# Altium PCB rffe-uc.PcbDoc
Units mm, origin at the board's own origin, x right, y up, seen from the top; angles counter-clockwise.
Board outline 61.25 x 30.98 mm, 6 copper layers (Top, Power Plane, Inner Layer 1, Inner Layer 2, GND, Bottom), stack 1.58 mm thick; 141 components, 138 nets, 611 pads, 0 vias.
Unrouted connection lines stored in the file: 353.
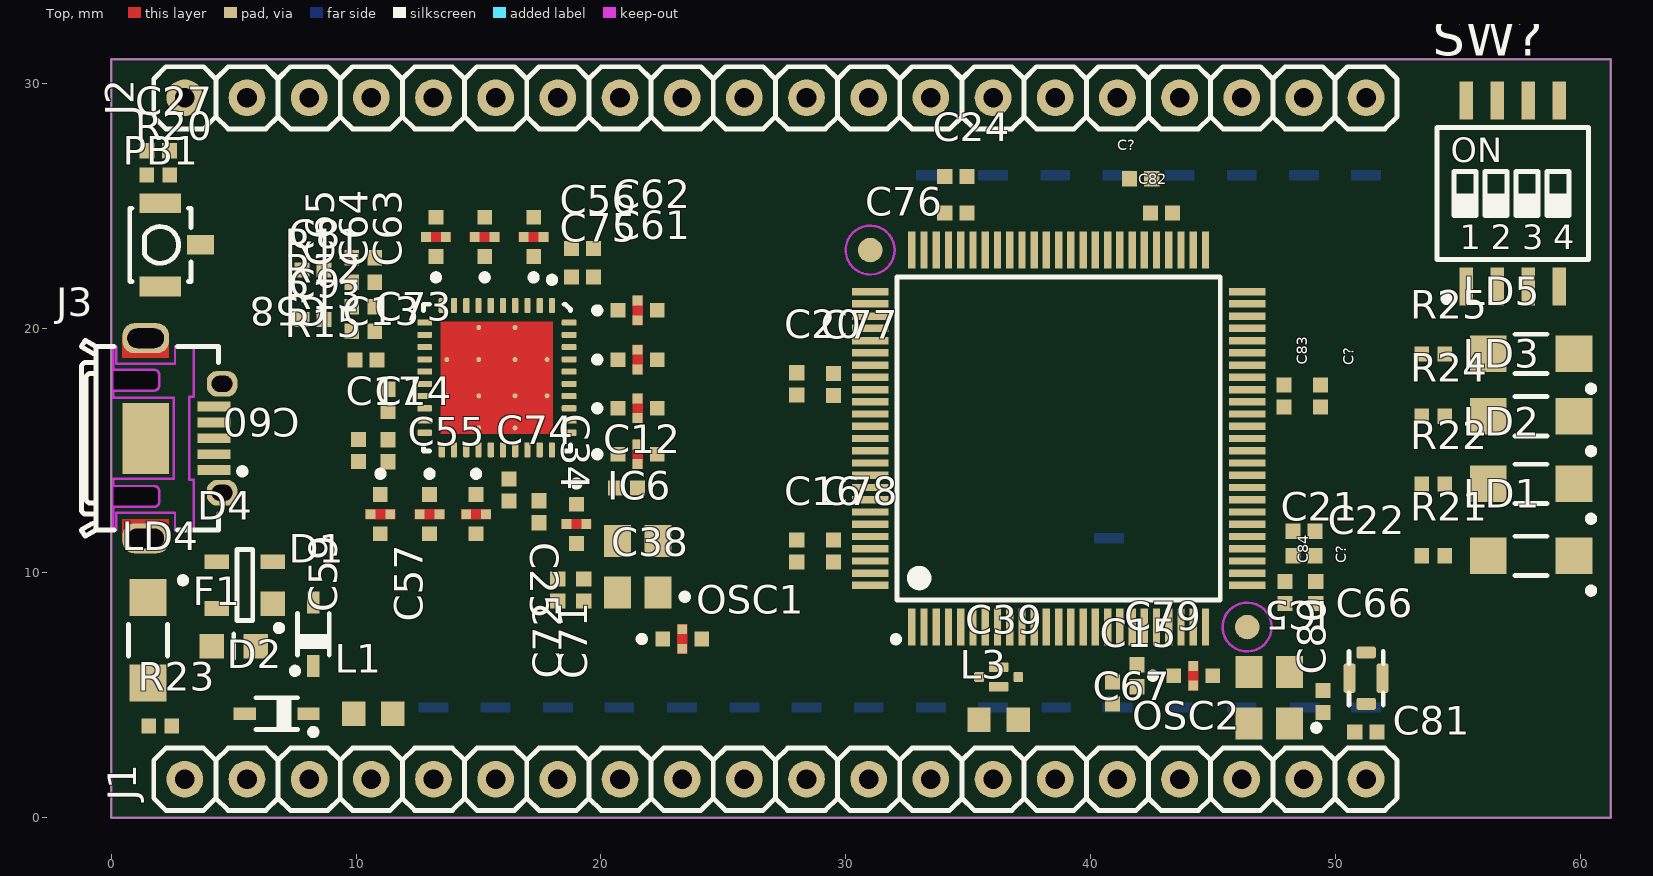
[diagram p0: Top view]
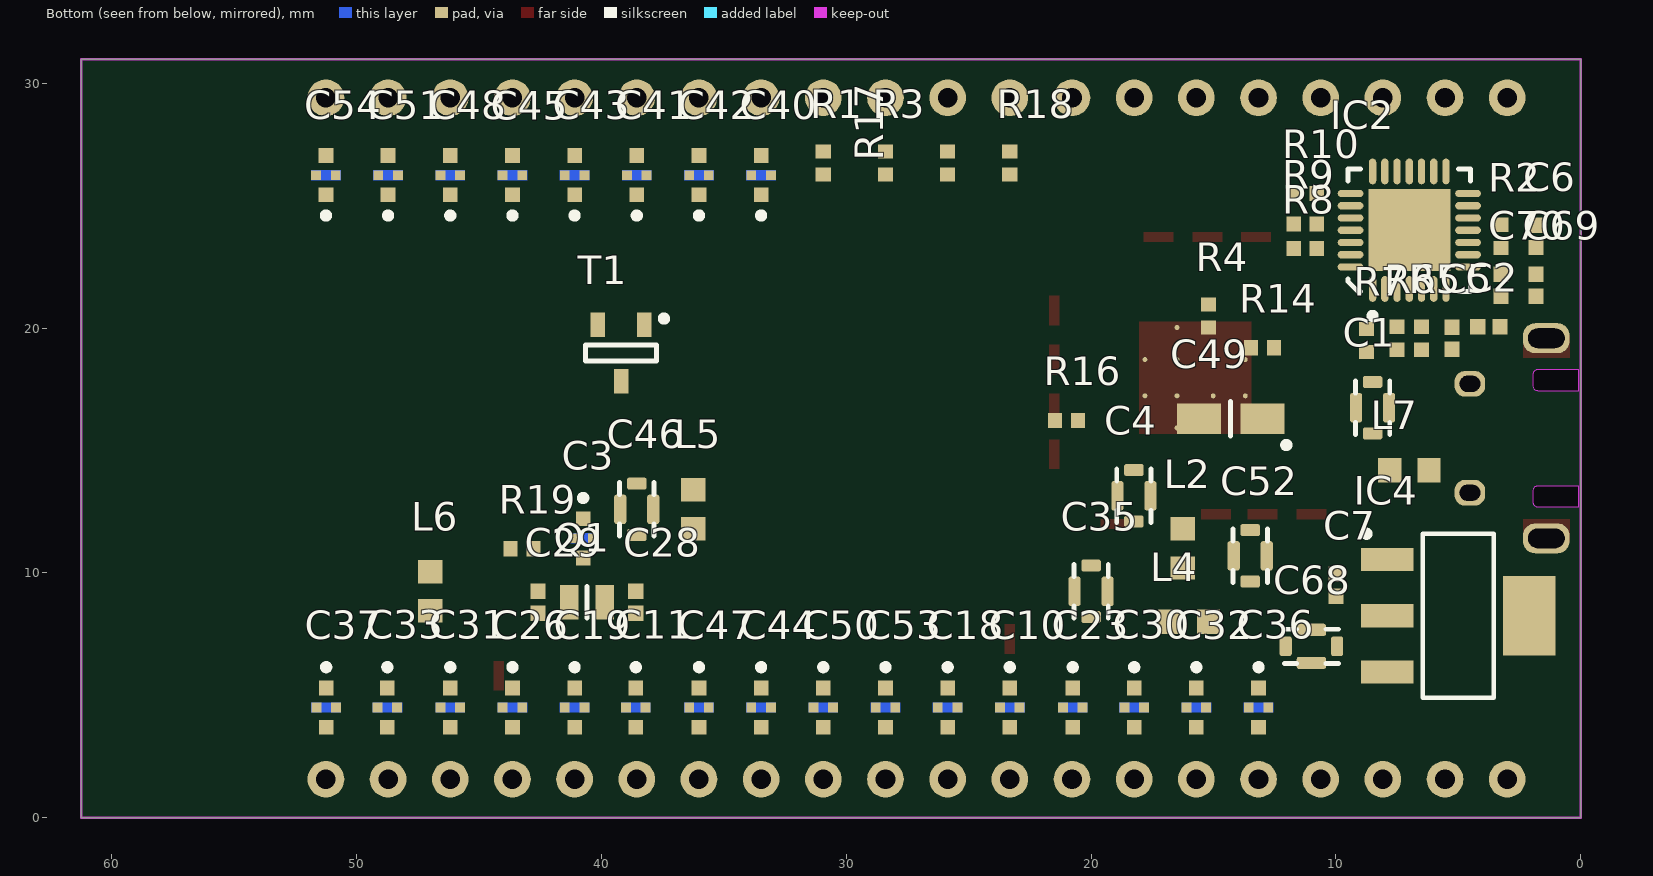
[diagram p1: Bottom view, seen from below]
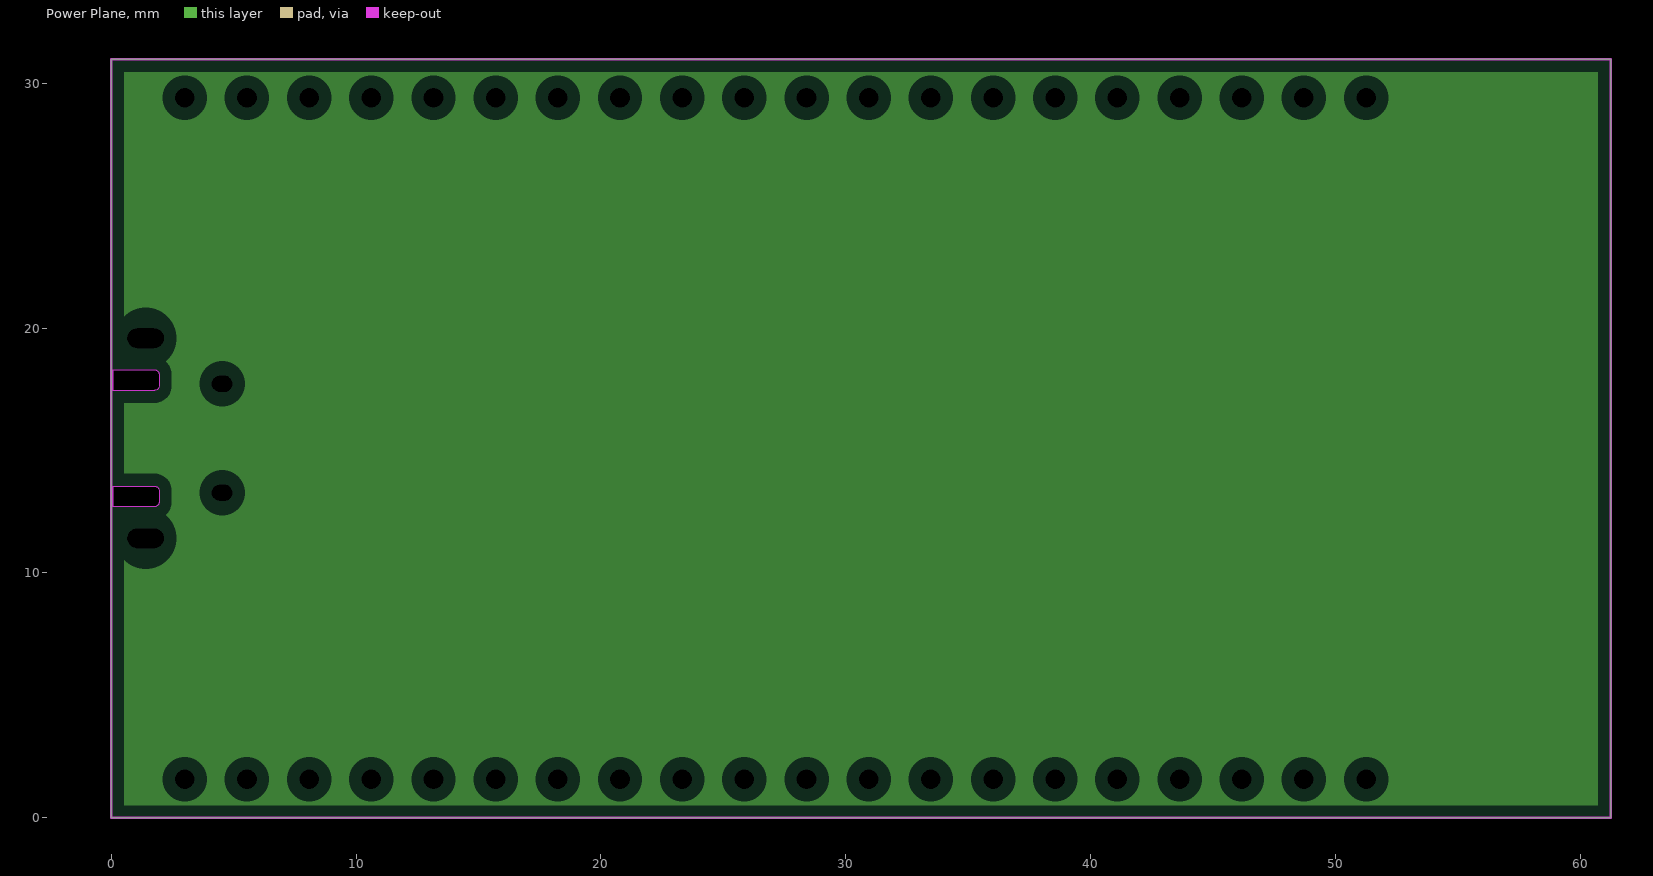
[diagram p2: Power Plane, clearances drawn from the general rule]
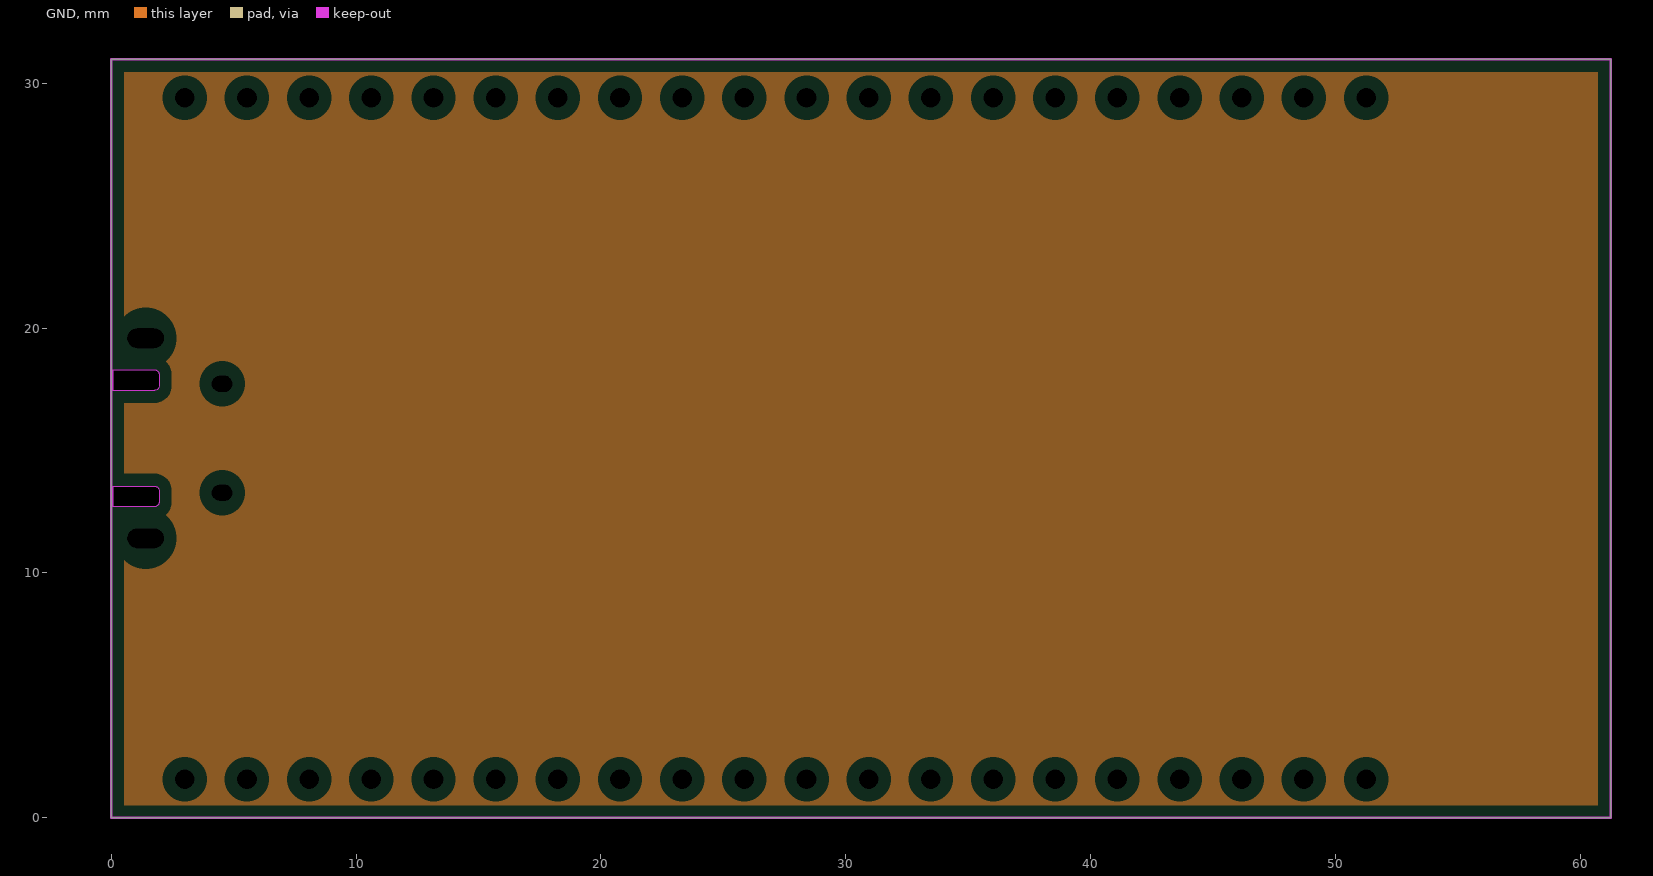
[diagram p3: GND, clearances drawn from the general rule]

## Layer stack, top to bottom
Top Solder: solder mask 0.01, Solder Resist, Dk 3.5
Top: signal copper 0.035
Dielectric 1: prepreg 0.23, FR-4, Dk 4.2
Power Plane: plane copper 0.035
Dielectric 3: prepreg 0.38, Dk 4.2
Inner Layer 1: signal copper 0.035
Dielectric 6: core 0.15, Dk 4.2
Inner Layer 2: signal copper 0.035
Dielectric 5: prepreg 0.38, Dk 4.2
GND: plane copper 0.035
Dielectric 4: prepreg 0.23, Dk 4.2
Bottom: signal copper 0.035
Bottom Solder: solder mask 0.01, Solder Resist, Dk 3.5

## Board outline
0,0 61.25,0 61.25,30.98 0,30.98

## Design rules (kind name [scope] priority, off if disabled: settings)
AcuteAngle [All] p1: minimum=6.00000000000000E+0001 checktracksonly=FALSE
BoardOutlineClearance [All] p1: gap=0.16 ignorepadtopadclearanceinfootprint=FALSE except(0: Arc-SplitContinuation Track-SplitContinuation SMDPad-SplitContinuation THPad-SplitContinuation Via-SplitContinuation Fill-SplitContinuation Poly-SplitContinuation Region-SplitContinuation Text-SplitContinuation)
Clearance [All] p1: gap=0.13 ignorepadtopadclearanceinfootprint=FALSE except(0: Arc-Hole Track-Hole SMDPad-Hole THPad-Hole Via-Hole Fill-Hole Poly-Hole Region-Hole Text-Hole)
ComponentClearance [All] p1: gap=0.025 collisioncheckmode=3 verticalgap=0.254 showdistances=TRUE
DiffPairsRouting [All] p1: maxlimit=0.4 minlimit=0.13 mostfreqgap=0.3 toplayer_minwidth=0.13 toplayer_maxwidth=0.4 toplayer_prefwidth=0.3 midlayer1_maxgap=0.254 midlayer1_prefgap=0.13 midlayer1_minwidth=0.25 midlayer1_maxwidth=0.381 midlayer1_prefwidth=0.25 midlayer2_maxgap=0.254 midlayer2_prefgap=0.13 midlayer2_minwidth=0.25 midlayer2_maxwidth=0.381 midlayer2_prefwidth=0.25 bottomlayer_minwidth=0.13 bottomlayer_maxwidth=0.4 bottomlayer_prefwidth=0.3 maxuncoupledlength=12.7
HoleSize [All] p1: absolutevalues=TRUE maxlimit=2.54 minlimit=0.305 maxpercent=80.000 minpercent=20.000
HoleToHoleClearance [All] p1: gap=0.15 allowstackedmicrovias=TRUE
MinimumAnnularRing [All] p1: minimumring=0.16
MinimumSolderMaskSliver [All] p1: minsoldermaskwidth=0.152
PlaneClearance [All] p1: clearance=0.508
PlaneConnect [All] p1: planeconnectstyle=Relief reliefexpansion=0.508 reliefentries=4 reliefconductorwidth=0.254 reliefairgap=0.254
PolygonConnect [All] p1: connectstyle=Relief reliefconductorwidth=0.254 reliefentries=4 polygonreliefangle="90 Angle" airgapwidth=0.254
RoutingCorners [All] p1: cornerstyle=45-Degree minsetback=1.52 maxsetback=1.52
RoutingVias [All] p1: holewidth=0.305 width=0.625 viastyle="Through Hole" minholewidth=0.305 minwidth=0.625 maxholewidth=0.711 maxwidth=1.27
SilkToSilkClearance [All] p1: silktosilkclearance=0.152
SolderMaskExpansion [All] p1: expansion=0.102
Width [All] p1: maxlimit=0.254 minlimit=0.13 preferedwidth=0.152 minimp=50.000000 maximp=50.000000 favimp=50.000000
21 further rules are at their usual default settings.

## Classes and differential pairs
net class USB_DATA: NetC21_2 NetC22_2 TGT_D_N TGT_D_P USB_D_N USB_D_P USB_D_R_N USB_D_R_P
net class ETH: RD_N RD_P TD_N TD_P
differential pair USB_D: +USB_D_P -USB_D_N
differential pair USB_D_R: +USB_D_R_P -USB_D_R_N
differential pair TGT_D: +TGT_D_P -TGT_D_N
differential pair TD: +TD_P -TD_N
differential pair RD: +RD_P -RD_N

## Components (designator, comment, footprint, x,y, rotation, side; value= is the part's Value field where it differs from the comment)
C1 "10uF" CAPC_MURATA_NFM21PS_0805 8.5,16.75 r90 bottom
C2 "1uF" CAPC1005X55N 3.75,20.058 r0 bottom
C3 "50pF" CAPC_MURATA_NFL18ST 40.75,11.412 r270 bottom
C4 "10uF" CAPC_MURATA_NFM21PS_0805 18.25,13.15 r90 bottom
C5 "100nF" CAPC1005X55N 5.25,19.588 r270 bottom
C6 "1uF" CAPC1005X55N 1.827,23.75 r90 bottom
C7 "100nF" CAPC1005X55N 10,9.5 r270 bottom
C8 "100nF" CAPC1005X55N 8.24,22.375 r180 top
C9 "100nF" CAPC1005X55N 8.24,20.35 r0 top
C10 "50pF" CAPC_MURATA_NFL18ST 23.32,4.5 r270 bottom
C11 "50pF" CAPC_MURATA_NFL18ST 38.6,4.5 r270 bottom
C12 "100nF" CAPC1005X55N 21.05,13.463 r0 top
C13 "100nF" CAPC1005X55N 10.4,18.7 r180 top
C14 "100nF" CAPC1005X55N 11.3,14.99 r270 top
C15 "100nF" CAPC1005X55N 40.9,5.1 r270 top
C16 "100nF" CAPC1005X55N 28,10.9 r270 top
C17 "100nF" CAPC1005X55N 10.1,15 r270 top
C18 "50pF" CAPC_MURATA_NFL18ST 25.86,4.5 r270 bottom
C19 "50pF" CAPC_MURATA_NFL18ST 41.1,4.5 r270 bottom
C20 "100nF" CAPC1005X55N 28,17.725 r90 top
C21 "18pF" CAPC1005X55N 48.72,10.7 r180 top
C22 "18pF" CAPC1005X55N 48.72,11.7 r180 top
C23 "50pF" CAPC_MURATA_NFL18ST 20.75,4.5 r270 bottom
C24 "100nF" CAPC1005X55N 34.5,26.2 r180 top
C25 "100nF" CAPC1005X55N 17.47,12.5 r270 top
C26 "50pF" CAPC_MURATA_NFL18ST 43.64,4.5 r270 bottom
C27 "100nF" CAPC1005X55N 1.92,27.25 r0 top
C28 "18pF" CAPC1005X55N 38.6,8.8 r90 bottom
C29 "18pF" CAPC1005X55N 42.6,8.8 r90 bottom
C30 "50pF" CAPC_MURATA_NFL18ST 18.24,4.5 r270 bottom
C31 "50pF" CAPC_MURATA_NFL18ST 46.18,4.5 r270 bottom
C32 "50pF" CAPC_MURATA_NFL18ST 15.7,4.5 r270 bottom
C33 "50pF" CAPC_MURATA_NFL18ST 48.75,4.5 r270 bottom
C34 "50pF" CAPC_MURATA_NFL18ST 19,12 r270 top
C35 "10uF" CAPC_MURATA_NFM21PS_0805 20,9.25 r270 bottom
C36 "50pF" CAPC_MURATA_NFL18ST 13.16,4.5 r270 bottom
C37 "50pF" CAPC_MURATA_NFL18ST 51.25,4.5 r270 bottom
C38 "50pF" CAPC_MURATA_NFL18ST 23.32,7.3 r0 top
C39 "1uF" CAPC_MURATA_NFM18PS_0603 36.25,5.75 r0 top
C40 "50pF" CAPC_MURATA_NFL18ST 33.48,26.25 r90 bottom
C41 "50pF" CAPC_MURATA_NFL18ST 38.56,26.25 r90 bottom
C42 "50pF" CAPC_MURATA_NFL18ST 36.02,26.25 r90 bottom
C43 "50pF" CAPC_MURATA_NFL18ST 41.1,26.25 r90 bottom
C44 "50pF" CAPC_MURATA_NFL18ST 33.48,4.5 r270 bottom
C45 "50pF" CAPC_MURATA_NFL18ST 43.64,26.25 r90 bottom
C46 "10uF" CAPC_MURATA_NFM21PS_0805 38.56,12.6 r90 bottom
C47 "50pF" CAPC_MURATA_NFL18ST 36.02,4.5 r270 bottom
C48 "50pF" CAPC_MURATA_NFL18ST 46.18,26.25 r90 bottom
C49 "10uF" CAPMP3216X180N 14.3,16.3 r0 bottom
C50 "50pF" CAPC_MURATA_NFL18ST 30.94,4.5 r270 bottom
C51 "50pF" CAPC_MURATA_NFL18ST 48.72,26.25 r90 bottom
C52 "10uF" CAPC_MURATA_NFM21PS_0805 13.5,10.7 r270 bottom
C53 "50pF" CAPC_MURATA_NFL18ST 28.4,4.5 r270 bottom
C54 "50pF" CAPC_MURATA_NFL18ST 51.26,26.25 r90 bottom
C55 "50pF" CAPC_MURATA_NFL18ST 13,12.4 r270 top
C56 "100nF" CAPC1005X55N 19.25,23.25 r0 top
C57 "50pF" CAPC_MURATA_NFL18ST 14.9,12.4 r270 top
C58 "50pF" CAPC_MURATA_NFL18ST 21.5,14.85 r0 top
C59 "50pF" CAPC_MURATA_NFL18ST 10.99,12.4 r270 top
C60 "50pF" CAPC_MURATA_NFL18ST 21.5,16.725 r0 top
C61 "50pF" CAPC_MURATA_NFL18ST 21.5,18.715 r0 top
C62 "50pF" CAPC_MURATA_NFL18ST 21.5,20.725 r0 top
C63 "50pF" CAPC_MURATA_NFL18ST 17.25,23.725 r90 top
C64 "50pF" CAPC_MURATA_NFL18ST 15.25,23.725 r90 top
C65 "50pF" CAPC_MURATA_NFL18ST 13.26,23.725 r90 top
C66 "10uF" CAPC_MURATA_NFM21PS_0805 51.26,5.7 r90 top
C67 "50pF" CAPC_MURATA_NFL18ST 44.2,5.8 r0 top
C68 "10uF" CAPC_MURATA_NFM21PS_0805 11,7 r180 bottom
C69 "100nF" CAPC1005X55N 1.827,21.75 r90 bottom
C70 "100pF" CAPC1005X55N 3.25,21.75 r90 bottom
C71 "100pF" CAPC1005X55N 19.3,9.3 r270 top
C72 "100nF" CAPC1005X55N 18.24,9.3 r90 top
C73 "100pF" CAPC1005X55N 11.3,17.05 r270 top
C74 "100pF" CAPC1005X55N 16.25,13.39 r90 top
C75 "100pF" CAPC1005X55N 19.25,22.09 r180 top
C76 "100pF" CAPC1005X55N 34.5,24.7 r0 top
C77 "100pF" CAPC1005X55N 29.5,17.7 r270 top
C78 "100pF" CAPC1005X55N 29.5,10.9 r90 top
C79 "100pF" CAPC1005X55N 41.9,5.8 r90 top
C80 "100nF" CAPC1005X55N 49.5,4.75 r90 top
C81 "100pF" CAPC1005X55N 51.25,3.5 r180 top
C82 "100pF" CAPC1005X55N 42.9,24.7 r0 top
C83 "100pF" CAPC1005X55N 47.9,17.225 r90 top
C84 "100pF" CAPC1005X55N 47.95,9.2 r90 top
C? "100nF" CAPC1005X55N 49.4,17.225 r270 top
C? "100nF" CAPC1005X55N 49.2,9.2 r270 top
C? "100nF" CAPC1005X55N 42.05,26.1 r180 top
D1 "BAT60A" SOD2512X110N 8.25,7.5 r90 top
D2 "BAT60A" SOD2512X110N 6.75,4.25 r180 top
D4 "PRTR5V0U2X" SOT190P230X110-4N 5.45,9.5 r180 top
F1 "350mA-6V" FUSR_LITTELFUSE_0603L010 5,7 r180 top
IC2 "CP2102-GM" QFN50P500X500X100-29N-S335 7,24 r90 bottom
IC4 "LD1117S33" SOT230P700X180-4N 5,8.25 r180 bottom
IC5 "LPC1769FBD100" QFP50P1600X1600X160-100N 38.7,15.49 r90 top
IC6 "DP83848J" QFN50P600X600X100-41N-S460_DP83848J 15.75,17.975 r270 top
J1 "" TYCO_1-1814655-5 3,1.57 r0 top locked
J2 "" TYCO_1-1814655-5 3,29.41 r0 top locked
J3 "" HIROSE_ZX62RD-AB-5P8 4.2,15.5 r270 top locked
L1 "1K@100MHz" INDC1608X95N 10.7,4.25 r180 top
L2 "1K@100MHz" INDC1608X95N 16.25,11 r90 bottom
L3 "1K@100MHz" INDC1608X95N 36.25,4 r0 top
L4 "1K@100MHz" INDC1608X95N 16,8 r0 bottom
L5 "1K@100MHz" INDC1608X95N 36.25,12.6 r270 bottom
L6 "1K@100MHz" INDC1608X95N 47,9.25 r90 bottom
L7 "1K@100MHz" INDC1608X95N 7,14.2 r0 bottom
LD1 "" LED_LITEON_LTST-C150TBKT 58,10.7 r180 top
LD2 "" LED_LITEON_LTST-C150TBKT 58,13.638 r180 top
LD3 "" LED_LITEON_LTST-C150TBKT 58,16.4 r180 top
LD4 "" LED_LITEON_LTST-C150TBKT 1.5,7.25 r270 top
LD5 "" LED_LITEON_LTST-C150TBKT 58,18.95 r180 top
OSC1 "50MHz" XTAL_CONNOR_CS_LNLS 21.5,10.25 r180 top
OSC2 "12MHz" XTAL_CONNOR_CS_LNLS 47.3,4.9 r180 top
PB1 "Push Button" PB_OMRON_B3U-1100P 2,23.4 r90 top
Q1 "32.768kHz" XTAL_ABRACON_ABS06 40.6,8.8 r180 bottom
R1 "220" RESC1005X40N 30.94,26.75 r270 bottom
R2 "2k2" RESC1005X40N 3.25,23.75 r90 bottom
R3 "220" RESC1005X40N 28.4,26.75 r270 bottom
R4 "2k2" RESC1005X40N 15.2,20.5 r90 bottom
R5 "33" RESC1005X40N 6.5,19.588 r90 bottom
R6 "33" RESC1005X40N 7.5,19.588 r90 bottom
R7 "2k2" RESC1005X40N 8.75,19.5 r90 bottom
R8 "2k2" RESC1005X40N 11.25,23.25 r0 bottom
R9 "2k2" RESC1005X40N 11.25,24.25 r0 bottom
R10 "10k" RESC1005X40N 11.25,25.5 r180 bottom
R11 "49R9" RESC1005X40N 10.29,22.875 r0 top
R12 "49R9" RESC1005X40N 10.29,21.875 r180 top
R13 "49R9" RESC1005X40N 10.29,20.875 r0 top
R14 "4k87" RESC1005X40N 13,19.2 r0 bottom
R15 "49R9" RESC1005X40N 10.29,19.875 r180 top
R16 "2k2" RESC1005X40N 21,16.225 r180 bottom
R17 "33" RESC1005X40N 25.86,26.75 r270 bottom
R18 "33" RESC1005X40N 23.32,26.75 r270 bottom
R19 "1k5" RESC1005X40N 43.25,10.99 r0 bottom
R20 "10k" RESC1005X40N 1.92,26.25 r0 top
R21 "220" RESC1005X40N 54,10.7 r0 top
R22 "220" RESC1005X40N 54,13.638 r0 top
R23 "220" RESC1005X40N 2,3.75 r180 top
R24 "220" RESC1005X40N 54,16.4 r180 top
R25 "220" RESC1005X40N 54,18.95 r0 top
SW? "Switch" SW_TYCO_1571983-4 57.25,25.5 r90 top
T1 "BSS84AK" SOT95P230X110-3N 39.2,18.99 r270 bottom

## Footprints (in the part's own frame and the unit in brackets; to place one, negate y for a bottom-side part, rotate by r counter-clockwise, add the part's x,y. Pads: shape width x height; smd on the part's side, far side on the other; paste and mask are expansions set on the pad)
CAPC1005X55N [mm] "Chip Capacitor, Body 1.0x0.55mm, IPC Medium Density"
  rect 0.62x0.62 smd: 1(-0.45,0) 2(0.45,0)
  body extent -0.52,-0.27 0.53,0.28, height 0.55
CAPC_MURATA_NFL18ST [mm] "EMIFIL Chip Capacitor, Body 1.6x0.8mm, MURATA NFL18ST Series"
  rect 0.6x0.6 smd: 1(-0.8,0) 3(0.8,0)
  rect 0.4x0.4 smd: 2(0,-0.4) 2(0,0.4)
  Top region: -0.2,0.6 -0.2,-0.6 0.2,-0.6 0.2,0.6
  silkscreen extent -1.77,-0.13 -1.53,0.12
CAPC_MURATA_NFM18PS_0603 [mm] "EMIFIL Chip Capacitor, Body 1.6x0.8mm, MURATA NFM18PS Series"
  rrect25% 0.4x0.4 smd: 1(-0.8,0) 3(0.8,0)
  rrect25% 0.8x0.4 smd: 2(0,-0.4) 2(0,0.4)
CAPC_MURATA_NFM21PS_0805 [mm] "EMIFIL Chip Capacitor, Body 2.0x1.25mm, MURATA NFM21PS Serie"
  rrect40% 0.5x0.8 smd: 1(-1.05,0) 3(1.05,0)
  rrect40% 1.2x0.5 smd: 2(0,-0.675) 2(0,0.675)
  silkscreen extent -1.1,-0.7 1.1,0.7, body extent -1.1,-0.67 1.1,0.68, height 0.95
CAPMP3216X180N [mm] "Capacitor, Polarized, Molded  Body 3.2x1.6mm, IPC Medium Density"
  rect 1.8x1.25 smd: 1(-1.3,0) 2(1.3,0)
  silkscreen extent -2.4,-0.7 0,1.2, body extent -1.7,-0.9 1.7,0.9, height 1.6
FUSR_LITTELFUSE_0603L010 [mm] "Surface Mount POLY-FUSE® Resettable PTC, 0603L Series"
  rect 1x1 smd: 1(-0.9,0) 2(0.9,0)
  silkscreen extent 0,-0.5 0,0.5, body extent -0.8,-0.4 0.8,0.4, height 0.75
HIROSE_ZX62RD-AB-5P8 [mm] "Right Angle, SMD Micro-USB Type AB - Reverse (Top mount), Shell Through Hole"
  rect 0.4x1.35 smd: 1(1.3,0) 2(0.65,0) 3(0,0) 4(-0.65,0) 5(-1.3,0)
  rrect80% 1.225x1.9 hole 0.8 slot 1.5 at 90 deg: 6(-4.088,-2.8) 6(4.088,-2.8)
  rrect80% 1.05x1.25 hole 0.65 slot 0.85 at 90 deg: 6(-2.225,0.325) 6(2.225,0.325)
  rect 2.9x1.9 smd: PastePad(0,-2.8)
  Top region: -4.2,-1.85 -4.2,-3.75 -3.3,-3.75 -3.3,-3.75 -3.3,-1.85
  Top region: 4.2,-3.75 4.2,-1.85 3.3,-1.85 3.3,-1.85 3.3,-3.75
  Top keep-out lines w0.1: 3.75,-4.125 3.75,-4 3.05,-4 3.05,-1.6 3.75,-1.6 3.75,-0.825 1.7,-0.825 1.7,-1.025 -1.7,-1.025 -1.7,-0.825 -3.75,-0.825 -3.75,-1.6 -3.05,-1.6 -3.05,-4 -3.75,-4 -3.75,-4.125 -2.8,-4.125 -2.8,-2.45 cw(c-2.6,-2.45) -2.6,-2.25 -2.15,-2.25 cw(c-2.15,-2.45) -1.95,-2.45 -1.95,-4.125 -1.65,-4.125 -1.65,-1.65 1.65,-1.65 1.65,-4.125 1.95,-4.125 1.95,-2.45 cw(c2.15,-2.45) 2.15,-2.25 2.6,-2.25 cw(c2.6,-2.45) 2.8,-2.45 2.8,-4.125 3.75,-4.125
  Keep-Out Layer board cut-out: 1.95,-4.125 1.95,-2.45 1.965,-2.373 2.009,-2.309 2.074,-2.265 2.15,-2.25 2.15,-2.25 2.6,-2.25 2.677,-2.265 2.741,-2.309 2.785,-2.373 2.8,-2.45 2.8,-2.45 2.8,-4.125
  Keep-Out Layer board cut-out: -2.8,-4.125 -2.8,-2.45 -2.785,-2.373 -2.741,-2.309 -2.676,-2.265 -2.6,-2.25 -2.6,-2.25 -2.15,-2.25 -2.073,-2.265 -2.009,-2.309 -1.965,-2.373 -1.95,-2.45 -1.95,-2.45 -1.95,-4.125
  silkscreen extent -4,-5.42 4,1.28, body extent -4.32,-5.42 4.33,0.47, height 2.78
INDC1608X95N [mm] "Chip Inductor, 2-Leads, EIA 0603, Metric 1608, Body 1.6x0.8mm, IPC Medium Density"
  rect 0.95x1 smd: 1(-0.8,0) 2(0.8,0)
  body extent -0.87,-0.47 0.88,0.48, height 0.95
LED_LITEON_LTST-C150TBKT [mm] "SMD InGaN Blue LED, 2-Leads, Body 3.2x1.6mm"
  rect 1.5x1.5 smd: 1(-1.75,0) 2(1.75,0)
  silkscreen extent -2.58,-0.8 0.65,1.55, body extent -1.6,-0.8 1.6,0.8, height 1.1
PB_OMRON_B3U-1100P [mm] "Body 1.2x3x2.5mm Ultra-Small Tactile Pushbutton Switch, (with Ground Terminal), OMRON B3U Series"
  rect 0.8x1.7 smd: 1(-1.7,0) 2(1.7,0)
  rect 0.8x1.1 smd: 3(0,-1.65)
  silkscreen extent -1.5,-1.25 1.5,1.25, body extent -2,-1.95 2,1.25, height 1.75
QFN50P500X500X100-29N-S335 [mm] "QFN, 0.50mm Pitch, Square; 28 pin, 5.00mm L X 5.00mm W X 1.00mm H body (w/thermal tab 3.35 X 3.35mm),  IPC Medium Density"
  oval 1.05x0.3 smd: 1(-2.4,1.5) 2(-2.4,1) 3(-2.4,0.5) 4(-2.4,0) 5(-2.4,-0.5) 6(-2.4,-1) 7(-2.4,-1.5) 15(2.4,-1.5) 16(2.4,-1) 17(2.4,-0.5) 18(2.4,0) 19(2.4,0.5) 20(2.4,1) 21(2.4,1.5)
  oval 0.3x1.05 smd: 8(-1.5,-2.4) 9(-1,-2.4) 10(-0.5,-2.4) 11(0,-2.4) 12(0.5,-2.4) 13(1,-2.4) 14(1.5,-2.4) 22(1.5,2.4) 23(1,2.4) 24(0.5,2.4) 25(0,2.4) 26(-0.5,2.4) 27(-1,2.4) 28(-1.5,2.4)
  rect 3.35x3.35 smd: 29(0,0)
  silkscreen extent -3.62,-2.5 2.5,2.5, body extent -2.5,-2.5 2.5,2.5, height 1
QFN50P600X600X100-41N-S460_DP83848J [mm] "QFN, 0.50mm Pitch, Square 40 pin, 6.00mm L X 6.00mm W X 1.00mm H body (w/thermal tab 4.6mm x 4.6mm), IPC Medium Density"
  rrect25% 0.6x0.25 smd: 1(-2.95,2.25) 2(-2.95,1.75) 3(-2.95,1.25) 4(-2.95,0.75) 5(-2.95,0.25) 6(-2.95,-0.25) 7(-2.95,-0.75) 8(-2.95,-1.25) 9(-2.95,-1.75) 10(-2.95,-2.25) 21(2.95,-2.25) 22(2.95,-1.75) 23(2.95,-1.25) 24(2.95,-0.75) 25(2.95,-0.25) 26(2.95,0.25) 27(2.95,0.75) 28(2.95,1.25) 29(2.95,1.75) 30(2.95,2.25)
  rrect25% 0.25x0.6 smd: 11(-2.25,-2.95) 12(-1.75,-2.95) 13(-1.25,-2.95) 14(-0.75,-2.95) 15(-0.25,-2.95) 16(0.25,-2.95) 17(0.75,-2.95) 18(1.25,-2.95) 19(1.75,-2.95) 20(2.25,-2.95) 31(2.25,2.95) 32(1.75,2.95) 33(1.25,2.95) 34(0.75,2.95) 35(0.25,2.95) 36(-0.25,2.95) 37(-0.75,2.95) 38(-1.25,2.95) 39(-1.75,2.95) 40(-2.25,2.95)
  round 0.2 all layers, no hole: 41(-2.05,-0.74) 41(-2.05,0.74) 41(-0.74,2.05) 41(-0.74,0.74) 41(-0.74,-0.74) 41(-0.74,-2.05) 41(0.74,2.05) 41(0.74,0.74) 41(0.74,-0.74) 41(0.74,-2.05) 41(2.05,-0.74) 41(2.05,0.74)
  Top region: -2.3,-2.3 2.3,-2.3 2.3,2.3 -2.3,2.3
  silkscreen extent -4.12,-3 3,3, body extent -3,-3 3,3, height 1
QFP50P1600X1600X160-100N [mm] "QFP, 0.50mm Pitch, Square; 100 Pin,14.00mm L X 14.00mm W X 1.60mm H Body, IPC Medium Density"
  rect 1.5x0.3 smd: 1(-7.7,6) 2(-7.7,5.5) 3(-7.7,5) 4(-7.7,4.5) 5(-7.7,4) 6(-7.7,3.5) 7(-7.7,3) 8(-7.7,2.5) 9(-7.7,2) 10(-7.7,1.5) 11(-7.7,1) 12(-7.7,0.5) 13(-7.7,0) 14(-7.7,-0.5) 15(-7.7,-1) 16(-7.7,-1.5) 17(-7.7,-2) 18(-7.7,-2.5) 19(-7.7,-3) 20(-7.7,-3.5) 21(-7.7,-4) 22(-7.7,-4.5) 23(-7.7,-5) 24(-7.7,-5.5) 25(-7.7,-6) 51(7.7,-6) 52(7.7,-5.5) 53(7.7,-5) 54(7.7,-4.5) 55(7.7,-4) 56(7.7,-3.5) 57(7.7,-3) 58(7.7,-2.5) 59(7.7,-2) 60(7.7,-1.5) 61(7.7,-1) 62(7.7,-0.5) 63(7.7,0) 64(7.7,0.5) 65(7.7,1) 66(7.7,1.5) 67(7.7,2) 68(7.7,2.5) 69(7.7,3) 70(7.7,3.5) 71(7.7,4) 72(7.7,4.5) 73(7.7,5) 74(7.7,5.5) 75(7.7,6)
  rect 0.3x1.5 smd: 26(-6,-7.7) 27(-5.5,-7.7) 28(-5,-7.7) 29(-4.5,-7.7) 30(-4,-7.7) 31(-3.5,-7.7) 32(-3,-7.7) 33(-2.5,-7.7) 34(-2,-7.7) 35(-1.5,-7.7) 36(-1,-7.7) 37(-0.5,-7.7) 38(0,-7.7) 39(0.5,-7.7) 40(1,-7.7) 41(1.5,-7.7) 42(2,-7.7) 43(2.5,-7.7) 44(3,-7.7) 45(3.5,-7.7) 46(4,-7.7) 47(4.5,-7.7) 48(5,-7.7) 49(5.5,-7.7) 50(6,-7.7) 76(6,7.7) 77(5.5,7.7) 78(5,7.7) 79(4.5,7.7) 80(4,7.7) 81(3.5,7.7) 82(3,7.7) 83(2.5,7.7) 84(2,7.7) 85(1.5,7.7) 86(1,7.7) 87(0.5,7.7) 88(0,7.7) 89(-0.5,7.7) 90(-1,7.7) 91(-1.5,7.7) 92(-2,7.7) 93(-2.5,7.7) 94(-3,7.7) 95(-3.5,7.7) 96(-4,7.7) 97(-4.5,7.7) 98(-5,7.7) 99(-5.5,7.7) 100(-6,7.7)
  round 1 smd paste-0.51 mask+0.5: FTG1(-7.7,-7.7) FTG2(7.7,7.7)
  Top keep-out circle w0.1: c7.7,7.7 r1
  Top keep-out circle w0.1: c-7.7,-7.7 r1
  silkscreen extent -8.32,-6.6 6.6,6.77, body extent -8.02,-8.02 8.02,8.02, height 1.6
RESC1005X40N [mm] "Chip Resistor, EIA 0402, Metric 1005, Body 1.0x0.5mm, IPC Medium Density"
  rect 0.58x0.62 smd: 1(-0.47,0) 2(0.47,0)
  body extent -0.52,-0.27 0.53,0.28, height 0.4
SOD2512X110N [mm] "Small Outline Diode Flat Lead (SOD-323), 1.70mm W X 1.25mm L X 1.10mm H body,  IPC Medium Density"
  rect 0.9x0.5 smd: 1(-1.3,0) 2(1.3,0)
  silkscreen extent -1.62,-0.65 0.85,0.87, body extent -1.35,-0.67 1.35,0.68, height 1.1
SOT95P230X110-3N [mm] "SOT23, 3 pin, Pitch 0.95mm - 1.3mm W X 2.9mm L X 1.1mm H, IPC Medium Density"
  rect 1x0.6 smd: 1(-1.15,0.95) 2(-1.15,-0.95) 3(1.15,0)
  silkscreen extent -1.52,-1.45 0.33,1.87, body extent -1.17,-1.5 1.33,1.5, height 1.1
SOT190P230X110-4N [mm] "SOT143, SOT, 1.90mm Pitch; 4 Pin, 1.30mm W X 2.90mm L X 1.10mm H body, IPC Medium Density"
  rect 1x1 smd: 1(-1.15,0.75)
  rect 1x0.6 smd: 2(-1.15,-0.95) 3(1.15,-0.95) 4(1.15,0.95)
  silkscreen extent -1.53,-1.45 0.33,1.87, body extent -1.25,-1.5 1.25,1.5, height 1.1
SOT230P700X180-4N [mm] "SOT223, 2.30mm pitch; 3 pin, 3.70mm W X 6.70mm L, IPC Medium Density"
  rect 2.15x0.95 smd: 1(-2.9,2.3) 2(-2.9,0) 3(-2.9,-2.3)
  rect 2.15x3.25 smd: 4(2.9,0)
  silkscreen extent -3.88,-3.35 1.45,3.47, body extent -3.65,-3.35 3.65,3.35, height 1.81
SW_TYCO_1571983-4 [mm] "Pitch 1.27mm,  Body 6.2x6.2mm, 4 Ways SPST Surface-Mount DIP Switch, TYCO GDH Serie"
  rect 1.55x0.55 smd: 1(-3.8,1.905) 2(-3.8,0.635) 3(-3.8,-0.635) 4(-3.8,-1.905) 5(3.8,-1.905) 6(3.8,-0.635) 7(3.8,0.635) 8(3.8,1.905)
  silkscreen extent -4.42,-3.1 2.7,3.1, body extent -4.06,-3.1 4.06,3.1, height 2.36
TYCO_1-1814655-5 [mm] "20 Positions, Pitch 2.54mm, Width 2.54mm, Heigh 4.4mm, SIP Straight Socket"
  round 1.5 hole 0.8: 1(0,0) 2(2.54,0) 3(5.08,0) 4(7.62,0) 5(10.16,0) 6(12.7,0) 7(15.24,0) 8(17.78,0) 9(20.32,0) 10(22.86,0) 11(25.4,0) 12(27.94,0) 13(30.48,0) 14(33.02,0) 15(35.56,0) 16(38.1,0) 17(40.64,0) 18(43.18,0) 19(45.72,0) 20(48.26,0)
  silkscreen extent -1.27,-1.27 49.53,1.27, body extent -1.27,-1.27 49.53,1.27, height 4.4
XTAL_ABRACON_ABS06 [mm] "2 Pins, 2.15x1.3mm, SMD Low Profile Crystal, ABS06 Series"
  rect 0.75x1.4 smd: 1(-0.725,0) 2(0.725,0)
  silkscreen extent 0,-0.65 0,0.65, body extent -1.07,-0.65 1.08,0.65, height 0.6
XTAL_CONNOR_CS_LNLS [mm] "4 Pins, 2.5x3.2mm, SMD Sealing Crystal, CS Serie"
  rect 1.1x1.3 smd: 1(-0.825,1.05) 2(-0.825,-1.05) 3(0.825,-1.05) 4(0.825,1.05)
  silkscreen extent -2.05,1.1 -1.8,1.35, body extent -1.25,-1.6 1.25,1.6, height 0.8

## Part data
C1 C4 C35 C46 C52 C66 C68: library part CEMIF_10UF_6.3V_MURATA_NFM21PS106B0J3D, "EMI Filter - Capacitor Type 1", Case=0805, Manufacturer=MURATA, Manufacturer Part Number=NFM21PS106B0J3D, Tolerance=±20%, Voltage=6.3V, Author="LNLS DIG GBMB", ComponentHeight=0.85, Component Type=Standard, CreateDate=03/11/2017, LatestRevisionDate=03/11/2017, Mounted=Yes, Part Description="4A EMI Filter Capacitor Type, NFM21PS Series (0805 Size)", Part Number=CEMIF_10UF_6.3V_MURATA_NFM21PS106B0J3D, Pin Count=4, Sense=No, SMD=Yes, Socket=No, Status=None
C2 C6: library part CC0402_1UF_16V_10%_X5R, "Non-polarised capacitor", Case=0402, Manufacturer=GENERIC, Manufacturer1 ComponentHeight=0.55mm, Manufacturer1 Example=TDK, Manufacturer1 Part Number=C1005X5R1C105KT, Tolerance=±10%, Voltage=16V, Author="CERN DEM JLC", Component Type=Standard, CreateDate=25/10/2012, HelpURL=\\cern.ch\dfs\Applications\Altium\Datasheets\CC0402_X5R_TDK_C.pdf, LatestRevisionDate=25/10/2012, Manufacturer Part Number=CC0402_1UF_16V_10%_X5R, Mounted=Yes, Part Description="SMD Multilayer Chip Ceramic Capacitor", Part Number=CC0402_1UF_16V_10%_X5R, Pin Count=2, Sense=No, SMD=Yes, Socket=No, Status=Preferred, TC=X5R
C3 C10 C11 C18 C19 C23 C26 C30 C31 C32 C33 C34 C36 C37 C38 C40 C41 C42 C43 C44 C45 C47 C48 C50 C51 C53 C54 C55 C57 C58 C59 C60 C61 C62 C63 C64 C65 C67: library part CEMIF_50pF_10V_MURATA_NFL18ST107H1A3D, "EMI Filter (LC Combined)", Case=0603, Manufacturer=MURATA, Manufacturer Part Number=NFL18ST107H1A3D, Tolerance=+20%, Voltage=10V, Author="LNLS DIG GBMB", ComponentHeight=0.70, Component Type=Standard, CreateDate=06/11/2017, LatestRevisionDate=06/11/2017, Mounted=Yes, Part Description="EMI Surface Mount Filter (T-type LC ), NFL18ST Series", Part Number=CEMIF_50pF_10V_MURATA_NFL18ST107H1A3D, Pin Count=4, Sense=No, SMD=Yes, Socket=No, Status=None
C5 C7 C8 C9 C12 C13 C14 C15 C16 C17 C20 C24 C25 C27 C56 C69 C72 C80 C? C? C?: library part CC0402_100NF_16V_10%_X5R, "Non-polarised capacitor", Case=0402, Manufacturer=GENERIC, Manufacturer1 ComponentHeight=0.55mm, Manufacturer1 Example=MURATA, Manufacturer1 Part Number=GRM155R61C104KA88D, Tolerance=±10%, Voltage=16V, Author="CERN DEM JLC", Component Type=Standard, CreateDate=10/12/2013, HelpURL=\\cern.ch\dfs\Applications\Altium\Datasheets\CC0402_X5R_MURATA_GRM.pdf, LatestRevisionDate=10/12/2013, Manufacturer Part Number=CC0402_100NF_16V_10%_X5R, Mounted=Yes, Part Description="SMD Multilayer Chip Ceramic Capacitor", Part Number=CC0402_100NF_16V_10%_X5R, Pin Count=2, Sense=No, SMD=Yes, Socket=No, Status=None, TC=X5R
C21 C22 C28 C29: library part CC0402_18PF_50V_5%_C0G, "Non-polarised capacitor", Case=0402, Manufacturer=GENERIC, Manufacturer1 ComponentHeight=0.55mm, Manufacturer1 Example=KEMET, Manufacturer1 Part Number=C0402C180J5GACTU, Tolerance=±5%, Voltage=50V, Author="CERN DEM JLC", Component Type=Standard, CreateDate=04/10/2016, HelpURL="\\cern.ch\dfs\Applications\Altium\Datasheets\CC0805_C0G_KEMET_(Commercial Grade).pdf", LatestRevisionDate=04/10/2016, Manufacturer Part Number=CC0402_18PF_50V_5%_C0G, Mounted=Yes, Part Description="SMD Multilayer Chip Ceramic Capacitor", Part Number=CC0402_18PF_50V_5%_C0G, Pin Count=2, Sense=No, SMD=Yes, Socket=No, Status=Preferred, TC=C0G/NP0
C39: library part CEMIF_1UF_6.3V_MURATA_NFM18PS105R0J3, "EMI Filter - Capacitor Type 1", Case=0603, Manufacturer=MURATA, Manufacturer Part Number=NFM18PS105R0J3D, Tolerance=±20%, Voltage=6.3V, Author="LNLS DIG GBMB", ComponentHeight=0.70, Component Type=Standard, CreateDate=03/11/2017, LatestRevisionDate=03/11/2017, Mounted=Yes, Part Description="2A EMI Filter Capacitor Type, NFM18PS Series (0603 Size)", Part Number=CEMIF_1UF_6.3V_MURATA_NFM18PS105R0J3, Pin Count=4, Sense=No, SMD=Yes, Socket=No, Status=None
C49: library part CTE3216-18_10UF_16V_20%_AVX_TCJ, "Polarised capacitor", Case=A, Manufacturer=AVX, Manufacturer Part Number=TCJA106M016R0200, Tolerance=±20%, Voltage=16V, Author="CERN DEM JLC", ComponentHeight=1.8mm, Component Type=Standard, CreateDate=29/03/2012, HelpURL=\\cern.ch\dfs\Applications\Altium\Datasheets\CTE_AVX_TCJ.pdf, LatestRevisionDate=29/03/2012, Mounted=Yes, Part Description="ESR 0R200 Tantalum Solid Electrolytic Chip Capacitor with Conductive Polymer Electrode", Part Number=CTE3216-18_10UF_16V_20%_AVX_TCJ, Pin Count=2, Sense=No, SMD=Yes, Socket=No, Status=Preferred
C70 C71 C73 C74 C75 C76 C77 C78 C79 C81 C82 C83 C84: library part CC0402_100PF_50V_5%_C0G, "Non-polarised capacitor", Case=0402, Manufacturer=GENERIC, Manufacturer1 ComponentHeight=0.55mm, Manufacturer1 Example=KEMET, Manufacturer1 Part Number=C0402C101J5GACTU, Tolerance=±5%, Voltage=50V, Author="CERN DEM JLC", Component Type=Standard, CreateDate=03/12/2007, HelpURL="\\cern.ch\dfs\Applications\Altium\Datasheets\CC0805_C0G_KEMET_(Commercial Grade).pdf", LatestRevisionDate=22/04/2015, Manufacturer Part Number=CC0402_100PF_50V_5%_C0G, Mounted=Yes, Part Description="SMD Multilayer Chip Ceramic Capacitor", Part Number=CC0402_100PF_50V_5%_C0G, Pin Count=2, Sense=No, SMD=Yes, Socket=No, Status=Preferred, TC=C0G/NP0
D1 D2: "Schottky Diode", Case=SOD323, Manufacturer=Infineon, Manufacturer Part Number=BAT6A, Power=3A, Voltage=10V, Author="LNLS DIG GBMB", Bonding=No, ComponentHeight=1.1mm, Component Type=Standard, CreateDate=04/08/2017, Device=BAT60A, LatestRevisionDate=04/08/2017, Mounted=Yes, PackageDescription="Small Outline Diode Flat Lead (SOD-323), 1.70mm W X 1.25mm L X 1.10mm H body,  IPC Medium Density", Part Description="High Current Schottky Diode", Part Number=BAT60A, Pin Count=2, PressFit=No, Sense=No, SMD=Yes, Socket=No
D4: "Ultra Low Capacitance Double Rail-to-Rail ESD Protection Diode", Case=SOT143B, Manufacturer="NXP SEMICONDUCTORS", Voltage=5.5V, Author="CERN DEM JLC", Bonding=No, ComponentHeight=1.1mm, Component Type=Standard, CreateDate=22/03/2011, Device=PRTR5V0U2X, HelpURL=\\cern.ch\dfs\Applications\Altium\Datasheets\PRTR5V0U2X.pdf, LatestRevisionDate=22/03/2011, Manufacturer Part Number=PRTR5V0U2X, Mounted=Yes, PackageDescription="SOT143B, SOT, 1.90mm Pitch; 4 Pin, 1.30mm W X 2.90mm L X 1.10mm H body, IPC Medium Density", Part Description="Ultra Low Capacitance (1pF) Double Rail-to-Rail ESD Protection Diode (8kV)", Part Number=PRTR5V0U2X, Pin Count=4, PressFit=No, Sense=No, SMD=Yes, Socket=No
F1: library part FUSR_LITTELFUSE_0603L035, "Fuse", Manufacturer=LITTELFUSE, Manufacturer Part Number=0603L035, Author="LNLS DIG LOS", ComponentHeight=1.55mm, Component Type=Standard, CreateDate=08/11/2017, Family="Fuses Resettable", LatestRevisionDate=08/11/2017, Mounted=Yes, PackageDescription="Surface Mount POLY-FUSE® Resettable PTC, 0603L Series", Part Description="POLYFUSE® Surface Mount Resettable PTC", Part Number=FUSR_LITTELFUSE_0603L035, Pin Count=2, PressFit=No, Sense=No, SMD=Yes, Socket=No
IC2: "Single-Chip USB to UART Bridge", Case=QFN28, Manufacturer="SILICON LABS", Author="CERN DEM JLC", Bonding=No, ComponentHeight=1.0mm, Component Type=Standard, CreateDate=03/03/2011, Device=CP2102-GM, HelpURL=\\cern.ch\dfs\Applications\Altium\Datasheets\CP2102-GM.pdf, LatestRevisionDate=03/03/2011, Manufacturer Part Number=CP2102-GM, Mounted=Yes, PackageDescription="QFN, 0.50mm Pitch, Square; 28 pin, 5.00mm L X 5.00mm W X 1.00mm H body (w/thermal tab 3.35 X 3.35mm),  IPC Medium Density", Part Description="Single-Chip USB to UART Bridge", Part Number=CP2102-GM, Pin Count=29, PressFit=No, Sense=No, SMD=Yes, Socket=No
IC4: "3-Terminal Regulator 1=GND 2=OUT 3=IN 4=OUT", Case=SOT223, Manufacturer="ST MICROELECTRONICS", Author="LNLS DIG LOS", Bonding=No, ComponentHeight=1.8mm, Component Type=Standard, CreateDate=28/07/2017, Device=LD1117S33, LatestRevisionDate=28/07/2017, Manufacturer Part Number=LD1117S33, Mounted=Yes, PackageDescription="SOT223, 2.30mm pitch; 3 pin, 3.70mm W X 6.70mm L, IPC Medium Density", Part Description="3.3V, 800mA Low-Dropout Positive Voltage Regulator", Part Number=LD1117S33, Pin Count=4, PressFit=No, Sense=No, SMD=Yes, Socket=No
IC5: "LPC1768 Series 64kB 120MHz 32-Bit ARM Cortex-M3 Microcontroller", Case=QFP100, Manufacturer="NXP SEMICONDUCTORS", Author="CERN DEM JLC", Bonding=No, ComponentHeight=1.6mm, Component Type=Standard, CreateDate=06/10/2016, Device=LPC1769FBD100, HelpURL=\\cern.ch\dfs\Applications\Altium\Datasheets\LPC1769FBD100.pdf, LatestRevisionDate=06/10/2016, Manufacturer Part Number=LPC1769FBD100, Mounted=Yes, PackageDescription="QFP, 0.50mm Pitch, Square; 100 Pin,14.00mm L X 14.00mm W X 1.60mm H Body, IPC Medium Density", Part Description="32-bit 120MHz ARM Cortex-M3 Microcontroller, 512kB Flash, 64kB SRAM, with Ethernet, USB 2.0 Host/Device/OTG, CAN", Part Number=LPC1769FBD100, Pin Count=100, PressFit=No, Sense=No, SMD=Yes, Socket=No
IC6: "DP83848x PHYTER Mini / LS Single Port 10/100 MB/s Ethernet Transceiver", Case="40-WFQFN Exposed Pad", Manufacturer="TEXAS INSTRUMENTS", Author="LNLS DIG LOS", Bonding=No, ComponentHeight=0.8mm, Component Type=Standard, CreateDate=28/07/2017, Device=DP83848J, LatestRevisionDate=28/07/2017, Manufacturer Part Number=DP83848J, Mounted=Yes, PackageDescription="QFN, 0.50mm Pitch, Square 40 pin, 6.00mm L X 6.00mm W X 1.00mm H body (w/thermal tab 4.6mm x 4.6mm), IPC Medium Density", Part Description="DP83848x PHYTER Mini / LS Single Port 10/100 MB/s Ethernet Transceiver", Part Number=DP83848J, Pin Count=41, PressFit=No, Sense=No, SMD=Yes, Socket=No
J1 J2: library part TYCO_1-1814655-5, "Connector 20 Female", Manufacturer="TYCO ELECTRONICS", Manufacturer Part Number=1-1814655-5, Author="CERN DEM JLC", ComponentHeight=4.4mm, Component Type=Standard, CreateDate=18/02/2009, Family=SOCKET, HelpURL=\\cern.ch\dfs\Applications\Altium\Datasheets\TYCO_1-1814655-5.pdf, LatestRevisionDate=18/02/2009, Mounted=Yes, Part Description="20 Positions, Pitch 2.54mm, Single Row (SIP), Straight Socket", Part Number=TYCO_1-1814655-5, Pin Count=20, PressFit=No, Sense=No, SMD=No, Socket=No, Status=None
J3: library part HIROSE_ZX62RD-AB-5P8, "5 Pin + 1 Shield USB Receptacle", Manufacturer="HIROSE (HRS)", Manufacturer Part Number=ZX62RD-AB-5P8, Author="CERN DEM JLC", ComponentHeight=2.35mm, ComponentLink1Description=Package-Drawing, ComponentLink1URL=\\cern.ch\dfs\Applications\Altium\Datasheets\HIROSE_ZX62RD-AB-5P8_Package-Drawing.pdf, Component Type=Standard, CreateDate=29/10/2014, Family="Micro-USB AB 2.0", HelpURL=\\cern.ch\dfs\Applications\Altium\Datasheets\HIROSE_ZX62RD-AB-5P8.pdf, LatestRevisionDate=29/10/2014, Mounted=Yes, Part Description="Micro-USB 2.0 Right Angle, SMD Type AB - Reverse (Top mount), Shell Through Hole", Part Number=HIROSE_ZX62RD-AB-5P8, Pin Count=7, PressFit=No, Sense=No, SMD=Yes, Socket=No, Status=None
L1 L2 L3 L4 L5 L6 L7: library part IND0603_MURATA_BLM18AG102SN1D, "Inductor", Case=0603, Manufacturer=MURATA, Manufacturer Part Number=BLM18AG102SN1D, Power=400mA, Resistance=0.50R, Tolerance=±25%, Author="LNLS DIG GBMB", ComponentHeight=0.95mm, Component Type=Standard, CreateDate=03/11/2017, LatestRevisionDate=03/11/2017, Mounted=Yes, Part Description="SMD EMIFIL Suppression Chip Ferrite Bead", Part Number=IND0603_MURATA_BLM18AG102SN1D, Pin Count=2, Sense=No, SMD=Yes, Socket=No, Status=None
LD1 LD2 LD3 LD4 LD5: library part LED_LITEON_LTST-C150TBKT, "LED Blue 1C 2A", Color=Blue, Manufacturer=DIALIGHT, Manufacturer Part Number=LTST-C150TBKT, Author="CERN DEM JLC", Bonding=No, ComponentHeight=1.1mm, Component Type=Standard, CreateDate=28/05/2013, HelpURL=\\cern.ch\dfs\Applications\Altium\Datasheets\LED_LITEON_LTST-C150TBKT.pdf, LatestRevisionDate=28/05/2013, Mounted=Yes, PackageDescription="SMD InGaN Blue LED, 2-Leads, Body 3.2x1.6mm", Part Description="SMT InGaN Blue LED", Part Number=LED_LITEON_LTST-C150TBKT, Pin Count=2, PressFit=No, Sense=No, SMD=Yes, Socket=No
OSC1: library part ASE-50-D-C-T, "Oscillator 4 pins 1=STBY 2=GND 3=OUT 4=Vdd", Manufacturer="ABRACON CORPORATION", Author="LNLS DIG LOS", Bonding=No, ComponentHeight=1.2mm, Component Type=Standard, CreateDate=31/07/2017, LatestRevisionDate=31/07/2017, Manufacturer Part Number=ASE-50-D-C-T, Mounted=Yes, PackageDescription="4 Pins, 2.5x3.2mm, SMD Sealing Crystal, CS Serie", Part Description="3.3V CMOS SMD Crystal Oscillator", Part Number=ASE-50-D-C-T, Pin Count=4, PressFit=No, Sense=No, SMD=Yes, Socket=No
OSC2: library part ASE-12-D-C-T, "=Part Description", Manufacturer="ABRACON CORPORATION", Author="LNLS DIG LOS", Bonding=No, ComponentHeight=1.2mm, Component Type=Standard, CreateDate=31/07/2017, LatestRevisionDate=31/07/2017, Manufacturer Part Number=ASE-12-D-C-T, Mounted=Yes, PackageDescription="4 Pins, 2.5x3.2mm, SMD Sealing Crystal, CS Serie", Part Description="3.3V CMOS SMD Crystal Oscillator", Part Number=ASE-12-D-C-T, Pin Count=4, PressFit=No, Sense=No, SMD=Yes, Socket=No
PB1: library part PB_OMRON_B3U-1100P, "Push-Button Switch SPDT", Manufacturer=OMRON, Author="CERN DEM JLC", ComponentHeight=1.75mm, Component Type=Standard, CreateDate=16/03/2010, Family="Push Button", HelpURL=\\cern.ch\dfs\Applications\Altium\Datasheets\PB_OMRON_B3U-1100P.pdf, LatestRevisionDate=16/03/2010, Manufacturer Part Number=PB_OMRON_B3U-1100P, Mounted=Yes, PackageDescription="Body 1.2x3x2.5mm Ultra-Small Tactile SPST Pushbutton Switch, (with Ground Terminal), OMRON B3U Series", Part Description="3x2.5mm Ultra-Small Tactile SPST Pushbutton Switch (with Ground Terminal),Contact Rating 50mA 12VDC, B3U Serie", Part Number=PB_OMRON_B3U-1100P, Pin Count=3, PressFit=No, Sense=No, SMD=Yes, Socket=No, Status=None
Q1: library part XTAL_32.768KHZ_ABRACON_ABS06-32.768KHZ-9, "Quartz Crystal", Manufacturer=ABRACON, Manufacturer Part Number=ABS06-32.768kHz-9, Author="CERN DEM JMW", Bonding=No, ComponentHeight=0.6mm, Component Type=Standard, CreateDate=12/08/2015, HelpURL=\\cern.ch\dfs\Applications\Altium\Datasheets\XTAL_ABRACON_ABS06.pdf, LatestRevisionDate=12/08/2015, Mounted=Yes, PackageDescription="2 Pins, 2.15x1.3mm, SMD Low Profile Crystal, ABS06 Series", Part Description="Tolerance: ±20ppm, -40°C to +85°C, 9pF, SMD Low Profile Crystal, ABS06 Series", Part Number=XTAL_32.768KHZ_ABRACON_ABS06-32.768KHZ-9, Pin Count=2, PressFit=No, Sense=No, SMD=Yes, Socket=No
R1 R3 R21 R22 R23 R24 R25: library part R0402_220R_1%_0.0625W_100PPM, "Resistor - 1%", Case=0402, Manufacturer=GENERIC, Manufacturer1 ComponentHeight=0.4mm, Manufacturer1 Example="YAGEO PHYCOMP", Manufacturer1 Part Number=232270672201L, Power=0.0625W, Tolerance=±1%, Author="CERN DEM JLC", Component Type=Standard, CreateDate=03/12/2007, HelpURL=\\cern.ch\dfs\Applications\Altium\Datasheets\R0402_Phycomp_RC0402.pdf, LatestRevisionDate=17/10/2012, Manufacturer Part Number=R0402_220R_1%_0.0625W_100PPM, Mounted=Yes, Part Description="General Purpose Thick Film Chip Resistor", Part Number=R0402_220R_1%_0.0625W_100PPM, Pin Count=2, Sense=No, SMD=Yes, Socket=No, Status="Not recommended", TC=±100ppm/°C
R2 R4 R7 R8 R9 R16: library part R0402_2K2_1%_0.0625W_100PPM, "Resistor - 1%", Case=0402, Manufacturer=GENERIC, Manufacturer1 ComponentHeight=0.4mm, Manufacturer1 Example="YAGEO PHYCOMP", Manufacturer1 Part Number=232270672202L, Power=0.0625W, Tolerance=±1%, Author="CERN DEM JLC", Component Type=Standard, CreateDate=03/12/2007, HelpURL=\\cern.ch\dfs\Applications\Altium\Datasheets\R0402_Phycomp_RC0402.pdf, LatestRevisionDate=17/10/2012, Manufacturer Part Number=R0402_2K2_1%_0.0625W_100PPM, Mounted=Yes, Part Description="General Purpose Thick Film Chip Resistor", Part Number=R0402_2K2_1%_0.0625W_100PPM, Pin Count=2, Sense=No, SMD=Yes, Socket=No, Status="Not recommended", TC=±100ppm/°C
R5 R6 R17 R18: library part R0402_33R_1%_0.0625W_100PPM, "Resistor - 1%", Case=0402, Manufacturer=GENERIC, Manufacturer1 ComponentHeight=0.4mm, Manufacturer1 Example="YAGEO PHYCOMP", Manufacturer1 Part Number=232270673309L, Power=0.0625W, Tolerance=±1%, Author="CERN DEM JLC", Component Type=Standard, CreateDate=03/12/2007, HelpURL=\\cern.ch\dfs\Applications\Altium\Datasheets\R0402_Phycomp_RC0402.pdf, LatestRevisionDate=17/10/2012, Manufacturer Part Number=R0402_33R_1%_0.0625W_100PPM, Mounted=Yes, Part Description="General Purpose Thick Film Chip Resistor", Part Number=R0402_33R_1%_0.0625W_100PPM, Pin Count=2, Sense=No, SMD=Yes, Socket=No, Status="Not recommended", TC=±100ppm/°C
R10 R20: library part R0402_10K_1%_0.0625W_100PPM, "Resistor - 1%", Case=0402, Manufacturer=GENERIC, Manufacturer1 ComponentHeight=0.4mm, Manufacturer1 Example="YAGEO PHYCOMP", Manufacturer1 Part Number=232270671003L, Power=0.0625W, Tolerance=±1%, Author="CERN DEM JLC", Component Type=Standard, CreateDate=03/12/2007, HelpURL=\\cern.ch\dfs\Applications\Altium\Datasheets\R0402_Phycomp_RC0402.pdf, LatestRevisionDate=17/10/2012, Manufacturer Part Number=R0402_10K_1%_0.0625W_100PPM, Mounted=Yes, Part Description="General Purpose Thick Film Chip Resistor", Part Number=R0402_10K_1%_0.0625W_100PPM, Pin Count=2, Sense=No, SMD=Yes, Socket=No, Status="Not recommended", TC=±100ppm/°C
R11 R12 R13 R15: library part R0402_49R9_1%_0.0625W_100PPM, "Resistor - 1%", Case=0402, Manufacturer=GENERIC, Manufacturer1 ComponentHeight=0.4mm, Manufacturer1 Example="YAGEO PHYCOMP", Manufacturer1 Part Number="232270674999L or RC0402FR-0749R9L", Power=0.0625W, Tolerance=±1%, Author="CERN DEM JLC", Component Type=Standard, CreateDate=24/10/2012, HelpURL=\\cern.ch\dfs\Applications\Altium\Datasheets\R0402_Phycomp_RC0402.pdf, LatestRevisionDate=24/10/2012, Manufacturer Part Number=R0402_49R9_1%_0.0625W_100PPM, Mounted=Yes, Part Description="General Purpose Thick Film Chip Resistor", Part Number=R0402_49R9_1%_0.0625W_100PPM, Pin Count=2, Sense=No, SMD=Yes, Socket=No, Status="Not recommended", TC=±100ppm/°C
R14: library part R0402_4K87_1%_0.0625W_100PPM, "Resistor - 1%", Case=0402, Manufacturer=GENERIC, Manufacturer1 ComponentHeight=0.4mm, Manufacturer1 Example=VISHAY, Manufacturer1 Part Number=CRCW04024K87FKED, Power=0.0625W, Tolerance=±1%, Author="CERN DEM JLC", Component Type=Standard, CreateDate=04/11/2014, HelpURL="\\cern.ch\dfs\Applications\Altium\Datasheets\R0402_VISHAY_CRCW e3.pdf", LatestRevisionDate=04/11/2014, Manufacturer Part Number=R0402_4K87_1%_0.0625W_100PPM, Mounted=Yes, Part Description="General Purpose Thick Film Chip Resistor", Part Number=R0402_4K87_1%_0.0625W_100PPM, Pin Count=2, Sense=No, SMD=Yes, Socket=No, Status=None, TC=±100ppm/°C
R19: library part R0402_1K5_1%_0.0625W_100PPM, "Resistor - 1%", Case=0402, Manufacturer=GENERIC, Manufacturer1 ComponentHeight=0.4mm, Manufacturer1 Example="YAGEO PHYCOMP", Manufacturer1 Part Number=232270671502L, Power=0.0625W, Tolerance=±1%, Author="CERN DEM JLC", Component Type=Standard, CreateDate=03/12/2007, HelpURL=\\cern.ch\dfs\Applications\Altium\Datasheets\R0402_Phycomp_RC0402.pdf, LatestRevisionDate=17/10/2012, Manufacturer Part Number=R0402_1K5_1%_0.0625W_100PPM, Mounted=Yes, Part Description="General Purpose Thick Film Chip Resistor", Part Number=R0402_1K5_1%_0.0625W_100PPM, Pin Count=2, Sense=No, SMD=Yes, Socket=No, Status="Not recommended", TC=±100ppm/°C
SW?: library part SW_TYCO_1571983-4, "4 Ways SPST DIP Switch", Manufacturer=TYCO, Manufacturer Part Number="1571983-4 or GDH04S04", Author="CERN DEM JLC", ComponentHeight=2.31mm, Component Type=Standard, CreateDate=08/01/2009, Family=Switch, HelpURL=\\cern.ch\dfs\Applications\Altium\Datasheets\SW_TYCO_1571983-4.pdf, LatestRevisionDate=08/01/2009, Mounted=Yes, PackageDescription="Pitch 1.27mm,  Body 6.2x6.2mm, 4 Ways SPST Surface-Mount DIP Switch, TYCO GDH Serie", Part Description="4 Way SPST SMD DIP Switch, Latched, Contact Rating 0.025A 24VDC", Part Number=SW_TYCO_1571983-4, Pin Count=8, PressFit=No, Sense=No, SMD=Yes, Socket=No, Status=None
T1: "50V, 180mA P-Channel Trench MOSFET", Case=SOT23-3, Manufacturer="NXP SEMICONDUCTORS", Author="CERN DEM JLC", Bonding=No, ComponentHeight=1.1mm, Component Type=Standard, CreateDate=16/04/2015, Device=BSS84AK, HelpURL=\\cern.ch\dfs\Applications\Altium\Datasheets\BSS84AK.pdf, LatestRevisionDate=16/04/2015, Manufacturer Part Number=BSS84AK, Mounted=Yes, PackageDescription="SOT23, 3 pin, Pitch 0.95mm - 1.3mm W X 2.9mm L X 1.1mm H, IPC Medium Density", Part Description="50V, 180mA P-channel Trench MOSFET Transistor", Part Number=BSS84AK, Pin Count=3, PressFit=No, Sense=No, SMD=Yes, Socket=No

## Nets (pads, with @x,y where several pads share a name; then routed paths per layer and width w, separated by ;. In a path a pad name is that pad's centre, name@x,y a point inside that pad or via, vN(x,y) a via of type N, cw(c..) or ccw(c..) an arc to the next point about the centre after c; other vN are vias at no path point)
50MHZ: C34.1 IC5.88 IC6.28
+3V3: C7.2 C8.1 C9.2 IC4.2 J2.1 L2.1 L4.1 L5.1 L6.2 R10.1 R11.1 R12.2 R13.1 R15.2 R23.1 T1.2
+3V3_LPC: C15.1 C16.1 C20.1 C24.1 C46.3 C76.2 C77.2 C78.2 C79.2 C82.2 C83.2 C84.2 C?.1 IC5.19 IC5.28 IC5.42 IC5.54 IC5.71 IC5.84 IC5.96 L3.2 R20.2
+3V3_PHY: C4.3 C25.1 C52.1 C56.1 C74.2 C75.2 IC6.1 IC6.26 R16.1
+5V: D1.2 F1.2 J2.2
CLK_12MHZ: C67.3 OSC2.3
CRS_DV_LPC: C58.3 IC5.92
CRS_DV_PHY: C58.1 IC6.33
DIP5: C36.3 J1.5
DIP5_LPC: C36.1 IC5.76
DIP6: C32.3 J1.6
DIP6_LPC: C32.1 IC5.77
DIP7: C30.3 J1.7
DIP7_LPC: C30.1 IC5.78
DIP8: C23.3 J1.8
DIP8_LPC: C23.1 IC5.79
DIP9: C10.3 J1.9
DIP9_LPC: C10.1 IC5.46
DIP10: C18.3 J1.10
DIP10_LPC: C18.1 IC5.47
DIP11: C53.3 J1.11
DIP11_LPC: C53.1 IC5.60
DIP12: C50.3 J1.12
DIP12_LPC: C50.1 IC5.61
DIP13: C44.3 J1.13
DIP13_LPC: C44.1 IC5.62
DIP14: C47.3 J1.14
DIP14_LPC: C47.1 IC5.63
DIP15: C11.3 J1.15
DIP15_LPC: C11.1 IC5.9
DIP16: C19.3 J1.16
DIP16_LPC: C19.1 IC5.8
DIP17: C26.3 J1.17
DIP17_LPC: C26.1 IC5.7
DIP18: C31.3 J1.18
DIP18_LPC: C31.1 IC5.6
DIP19: C33.3 J1.19
DIP19_LPC: C33.1 IC5.21
DIP20: C37.3 J1.20
DIP20_LPC: C37.1 IC5.20
DIP21: C54.3 J2.20
DIP21_LPC: C54.1 IC5.68
DIP22: C51.3 J2.19
DIP22_LPC: C51.1 IC5.69
DIP23: C48.3 J2.18
DIP23_LPC: C48.1 IC5.70
DIP24: C45.3 J2.17
DIP24_LPC: C45.1 IC5.73
DIP25: C43.3 J2.16
DIP25_LPC: C43.1 IC5.74
DIP26: C41.3 J2.15
DIP26_LPC: C41.1 IC5.75
DIP27: C42.3 J2.14
DIP27_LPC: C42.1 IC5.49
DIP28: C40.3 J2.13
DIP28_LPC: C40.1 IC5.48
ETH_OSC_EN: C38.3 IC5.43
ETH_RST: C59.3 IC5.44
ETH_RST_PHY: C59.1 IC6.23
GND: C1.2 C2.1 C3.2 C4.2 C5.2 C6.1 C7.1 C8.2 C9.1 C10.2 C11.2 C12.2 C13.2 C14.2 C15.2 C16.2 C17.2 C18.2 C19.2 C20.2 C21.1 C22.1 C23.2 C24.2 C25.2 C26.2 C27.2 C28.2 C29.2 C30.2 C31.2 C32.2 C33.2 C34.2 C35.2 C36.2 C37.2 C38.2 C39.2 C40.2 C41.2 C42.2 C43.2 C44.2 C45.2 C46.2 C47.2 C48.2 C49.2 C50.2 C51.2 C52.2 C53.2 C54.2 C55.2 C56.2 C57.2 C58.2 C59.2 C60.2 C61.2 C62.2 C63.2 C64.2 C65.2 C66.2 C67.2 C68.2 C69.2 C70.1 C71.1 C72.2 C73.1 C74.1 C75.1 C76.1 C77.1 C78.1 C79.1 C80.2 C81.1 C82.1 C83.1 C84.1 C?.2 D4.1 IC2.3 IC2.29 IC4.1 IC5.11 IC5.15 IC5.31 IC5.41 IC5.55 IC5.72 IC5.83 IC5.97 IC6.13 IC6.17 IC6.29 IC6.40 IC6.41 J1.1 J3.5 J3.6 LD1.1 LD2.1 LD3.1 LD4.1 LD5.1 OSC1.2 OSC2.2 PB1.1 PB1.3 R4.1 R14.2 SW?.5 SW?.6 SW?.7 SW?.8
LED-1: IC5.32 R21.1
LED-2: IC5.34 R22.1
LED-3: IC5.35 R24.1
LED-4: IC5.37 R25.1
LED_LINK: IC6.22 J2.12 R1.1
LED_SPEED: IC6.21 J2.11 R3.1
MDC_LPC: C57.3 IC5.87
MDC_PHY: C57.1 IC6.25
MDIO_LPC: C55.3 IC5.86
MDIO_PHY: C55.1 IC6.24
NetC1_1: C1.1 L7.2
NetC3_1: C3.1 IC2.28
NetC4_1: C4.1 L2.2
NetC17_1: C17.1 C52.3 C73.2 IC6.18
NetC21_2: C21.2 IC5.29 R17.2 R19.2
NetC22_2: C22.2 IC5.30 R18.2
NetC34_3: C34.3 OSC1.3
NetC35_1: C35.1 L4.2
NetC35_3: C35.3 C71.2 C72.1 OSC1.4
NetC38_1: C38.1 OSC1.1
NetC39_1: C39.1 L3.1
NetC39_3: C39.3 IC5.10 IC5.12
NetC46_1: C46.1 L5.2
NetC66_1: C66.1 C80.1 C81.2 OSC2.1 OSC2.4
NetC66_3: C66.3 L6.1
NetC67_1: C67.1 IC5.22
NetC68_1: C68.1 L1.2
NetC68_3: C68.3 IC4.3
NetD1_1: D1.1 D2.1 L1.1
NetD4_4: D4.4 J3.1 L7.1
NetIC5_39: IC5.39 R1.2
NetIC5_40: IC5.40 R3.2
NetIC6_6: IC6.6 IC6.7 R4.2
NetIC6_20: IC6.20 R14.1
NetIC6_32: IC6.32 R16.2
NetLD1_2: LD1.2 R21.2
NetLD2_2: LD2.2 R22.2
NetLD3_2: LD3.2 R24.2
NetLD4_2: LD4.2 R23.2
NetLD5_2: LD5.2 R25.2
NetR19_1: R19.1 T1.3
PFBOUT: C12.1 C13.1 C14.1 C49.1 IC6.16 IC6.19 IC6.30
RD_N: IC6.11 J2.5 R11.2
RD_P: IC6.12 J2.6 R12.1
RI: IC2.2 R7.1
RTCX1: C28.1 IC5.16 Q1.2
RTCX2: C29.1 IC5.18 Q1.1
RX_ER_LPC: C60.3 IC5.89
RX_ER_PHY: C60.1 IC6.34
RXD0_LPC: C61.3 IC5.91
RXD0_PHY: C61.1 IC6.36
RXD1_LPC: C62.3 IC5.90
RXD1_PHY: C62.1 IC6.37
TD_N: IC6.14 J2.7 R13.2
TD_P: IC6.15 J2.8 R15.1
TGT_D_N: J2.9 R18.1
TGT_D_P: J2.10 R17.1
TGT_SCON: IC5.64 T1.1
TX_EN_LPC: C63.3 IC5.93
TX_EN_PHY: C63.1 IC6.3
TXD0_LPC: C64.3 IC5.95
TXD0_PHY: C64.1 IC6.4
TXD1_LPC: C65.3 IC5.94
TXD1_PHY: C65.1 IC6.5
USB_D_N: IC2.5 R5.2
USB_D_P: IC2.4 R6.2
USB_D_R_N: D4.3 J3.2 R5.1
USB_D_R_P: D4.2 J3.3 R6.1
USB_DTR_RESET: C3.3 C27.1 IC5.17 PB1.2 R20.1
USB_R_RXD: IC2.25 R9.1
USB_R_TXD: IC2.26 R8.1
USB_RST: IC2.9 R2.1
USB_RTS: IC2.24 IC5.53 R10.2
USB_RXD: IC5.98 R9.2
USB_TXD: IC5.99 R8.2
USB_VBUS: C1.3 C2.2 C69.1 C70.2 F1.1 IC2.7 IC2.8
USB_VDD: C5.1 C6.2 IC2.6 R2.2 R7.2
VIN: D2.2 J1.2
pads on no net: IC2.1 IC2.10 IC2.11 IC2.12 IC2.13 IC2.14 IC2.15 IC2.16 IC2.17 IC2.18 IC2.19 IC2.20 IC2.21 IC2.22 IC2.23 IC2.27 IC4.4 IC5.1 IC5.2 IC5.3 IC5.4 IC5.5 IC5.13 IC5.14 IC5.23 IC5.24 IC5.25 IC5.26 IC5.27 IC5.33 IC5.36 IC5.38 IC5.45 IC5.50 IC5.51 IC5.52 IC5.56 IC5.57 IC5.58 IC5.59 IC5.65 IC5.66 IC5.67 IC5.80 IC5.81 IC5.82 IC5.85 IC5.100 IC5.FTG1 IC5.FTG2 IC6.2 IC6.8 IC6.9 IC6.10 IC6.27 IC6.31 IC6.35 IC6.38 IC6.39 J1.3 J1.4 J2.3 J2.4 J3.4 J3.PastePad SW?.1 SW?.2 SW?.3 SW?.4

## Polygon pours and split planes (outlines as drawn)
no net on Power Plane (split plane): 60.74,0.51 0.51,0.51 0.51,12.189 1.79,12.189 1.889,12.199 1.947,12.217 1.985,12.228 2.059,12.259 2.07,12.265 2.147,12.306 2.164,12.32 2.224,12.369 2.28,12.426 2.333,12.49 2.344,12.503 2.364,12.541 2.391,12.591 2.422,12.665 2.451,12.761 2.457,12.824 2.46,12.86 2.46,12.9 2.46,13.35 2.46,13.39 2.457,13.425 2.451,13.489 2.422,13.585 2.391,13.659 2.364,13.709 2.344,13.747 2.333,13.76 2.28,13.824 2.224,13.88 2.174,13.922 2.147,13.944 2.109,13.964 2.059,13.991 1.985,14.022 1.918,14.042 1.889,14.051 1.826,14.057 1.79,14.06 0.51,14.06 0.51,16.939 1.79,16.939 1.889,16.949 1.947,16.967 1.985,16.978 2.059,17.009 2.07,17.015 2.147,17.056 2.164,17.07 2.224,17.119 2.28,17.176 2.333,17.24 2.344,17.253 2.364,17.291 2.391,17.341 2.422,17.415 2.451,17.511 2.457,17.574 2.46,17.61 2.46,17.65 2.46,18.1 2.46,18.14 2.457,18.175 2.451,18.239 2.422,18.335 2.391,18.409 2.364,18.459 2.344,18.497 2.333,18.51 2.28,18.574 2.224,18.63 2.174,18.672 2.147,18.694 2.109,18.714 2.059,18.741 1.985,18.772 1.918,18.792 1.889,18.801 1.826,18.807 1.79,18.81 0.51,18.81 0.51,30.47 60.74,30.47
no net on GND (split plane): 60.74,0.51 0.51,0.51 0.51,12.189 1.79,12.189 1.889,12.199 1.947,12.217 1.985,12.228 2.059,12.259 2.07,12.265 2.147,12.306 2.164,12.32 2.224,12.369 2.28,12.426 2.333,12.49 2.344,12.503 2.364,12.541 2.391,12.591 2.422,12.665 2.451,12.761 2.457,12.824 2.46,12.86 2.46,12.9 2.46,13.35 2.46,13.39 2.457,13.425 2.451,13.489 2.422,13.585 2.391,13.659 2.364,13.709 2.344,13.747 2.333,13.76 2.28,13.824 2.224,13.88 2.174,13.922 2.147,13.944 2.109,13.964 2.059,13.991 1.985,14.022 1.918,14.042 1.889,14.051 1.826,14.057 1.79,14.06 0.51,14.06 0.51,16.939 1.79,16.939 1.889,16.949 1.947,16.967 1.985,16.978 2.059,17.009 2.07,17.015 2.147,17.056 2.164,17.07 2.224,17.119 2.28,17.176 2.333,17.24 2.344,17.253 2.364,17.291 2.391,17.341 2.422,17.415 2.451,17.511 2.457,17.574 2.46,17.61 2.46,17.65 2.46,18.1 2.46,18.14 2.457,18.175 2.451,18.239 2.422,18.335 2.391,18.409 2.364,18.459 2.344,18.497 2.333,18.51 2.28,18.574 2.224,18.63 2.174,18.672 2.147,18.694 2.109,18.714 2.059,18.741 1.985,18.772 1.918,18.792 1.889,18.801 1.826,18.807 1.79,18.81 0.51,18.81 0.51,30.47 60.74,30.47

## Keep-outs
Keep-Out Layer:
  the board outline again, w0.1

## Text inside footprints (layer, text, board x,y; h text height)
J3: Mechanical 8 "PCB end" at -0.875,19.8 h0.5 r270
SW?: Top Overlay "1" at 55.091,23.214 h1; Top Overlay "2" at 56.361,23.214 h1; Top Overlay "ON" at 54.71,26.77 h1; Top Overlay "3" at 57.631,23.214 h1; Top Overlay "4" at 58.901,23.214 h1; Mechanical 14 "1" at 55.091,23.224 h1; Mechanical 14 "2" at 56.361,23.224 h1; Mechanical 14 "ON" at 54.71,26.78 h1; Mechanical 14 "3" at 57.631,23.224 h1; Mechanical 14 "4" at 58.901,23.224 h1